# Altium PCB 底板-PCB.PcbDoc
Units mm, origin at the board's own origin, x right, y up, seen from the top; angles counter-clockwise.
Board outline 100 x 60 mm, 2 copper layers (Top Layer, Bottom Layer); 20 components, 38 nets, 84 pads, 0 vias.
Unrouted connection lines stored in the file: 33.
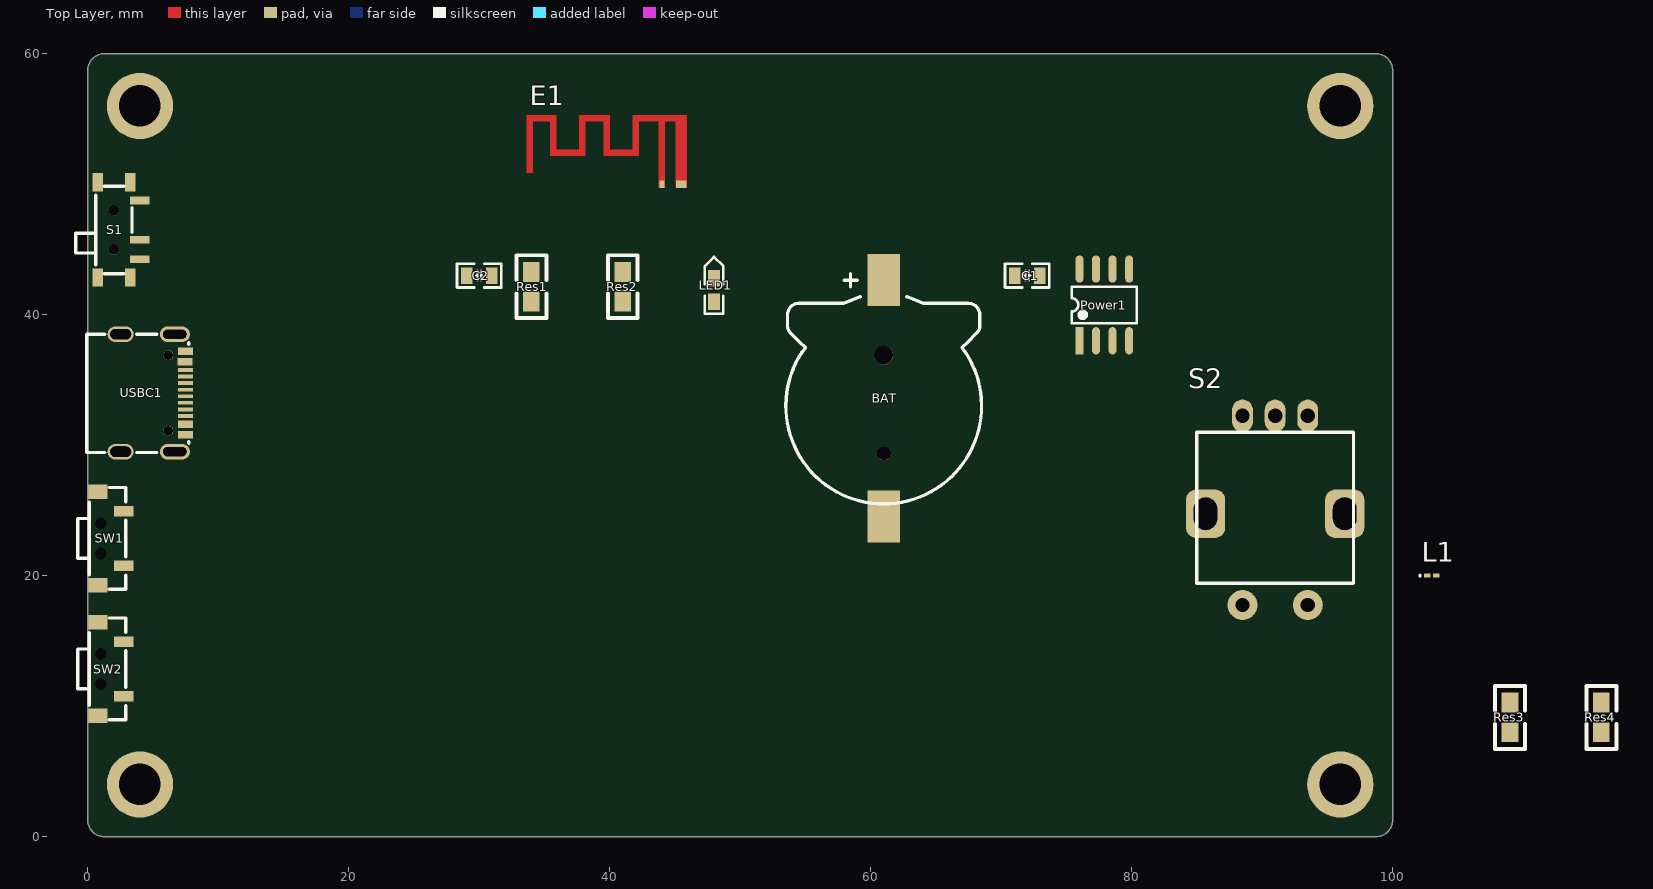
[diagram p0: Top Layer view]
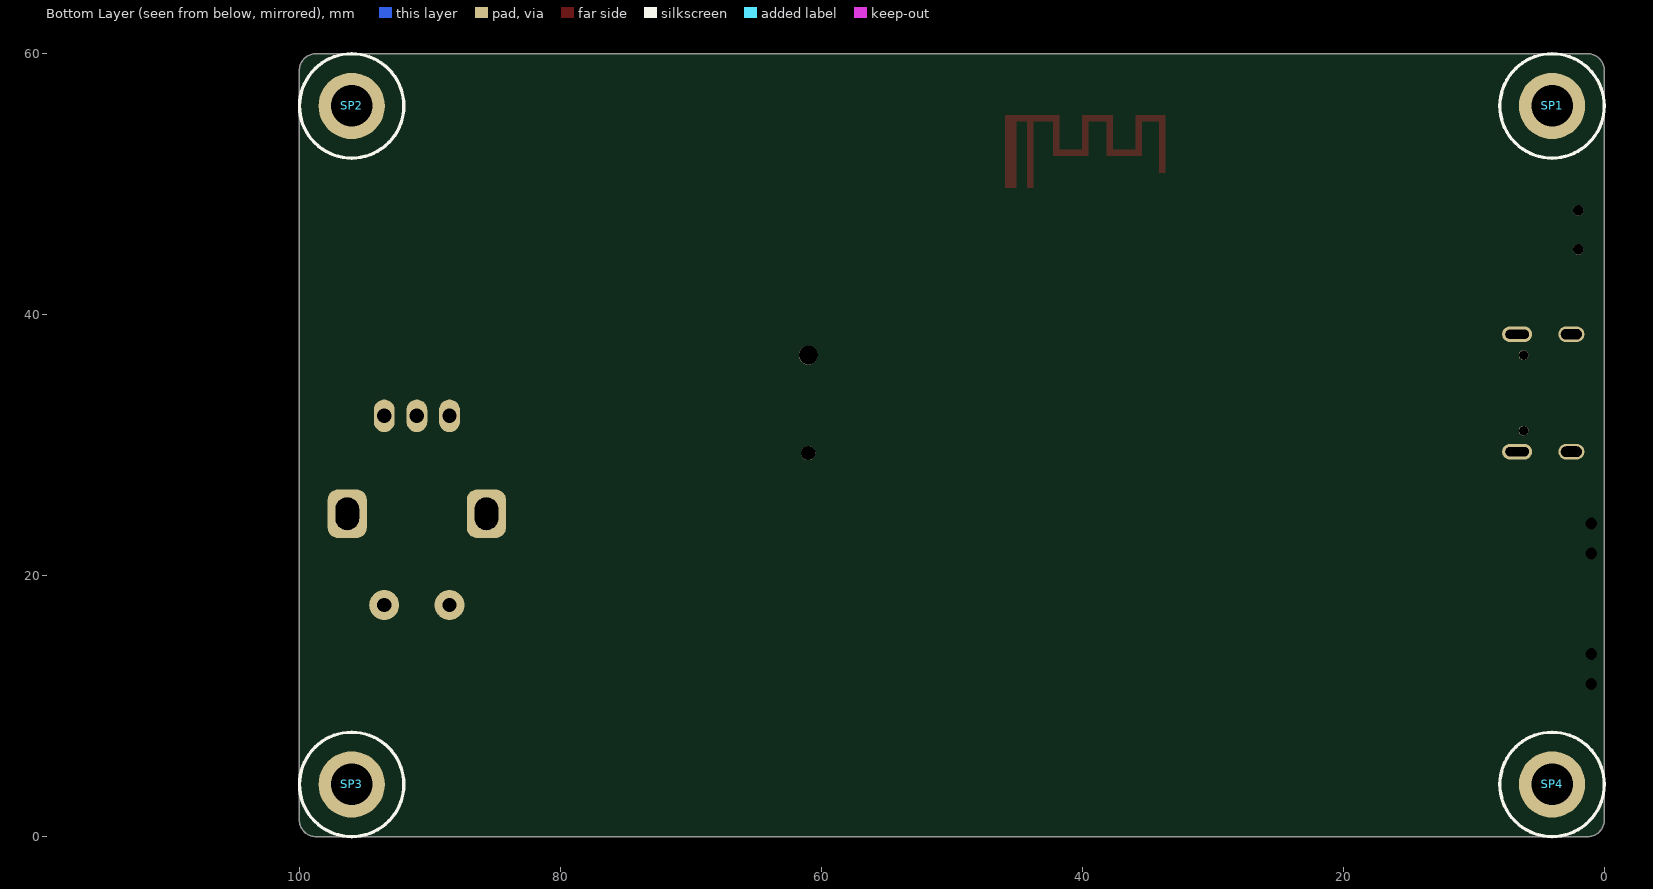
[diagram p1: Bottom Layer view, seen from below]

## Layer stack, top to bottom
Top Solder: solder mask 0.0102, Solder Resist, Dk 3.5
Top Layer: signal copper 0.0356
Dielectric 1: dielectric 0.32, FR-4, Dk 4.8
Bottom Layer: signal copper 0.0356
Bottom Solder: solder mask 0.0102, Solder Resist, Dk 3.5

## Board outline
0,1.27 0,58.73 cw(c1.27,58.73) 1.27,60 98.73,60 cw(c98.73,58.73) 100,58.73 100,1.27 cw(c98.73,1.27) 98.73,0 1.27,0 cw(c1.27,1.27)

## Design rules (kind name [scope] priority, off if disabled: settings)
Clearance [All] p1: gap=0.254 ignorepadtopadclearanceinfootprint=TRUE except(0: Arc-Hole Track-Hole SMDPad-Hole THPad-Hole Via-Hole Fill-Hole Poly-Hole Region-Hole Text-Hole)
PlaneConnect [All] p1: planeconnectstyle=Direct reliefexpansion=0.508 reliefentries=4 reliefconductorwidth=0.254 reliefairgap=0.254
PolygonConnect [All] p1: connectstyle=Direct reliefconductorwidth=0.254 reliefentries=4 polygonreliefangle="90 Angle" airgapwidth=0.254
RoutingVias [All] p1: holewidth=10 width=10 viastyle="Through Hole" minholewidth=0 minwidth=0 maxholewidth=0.711 maxwidth=1.27
SolderMaskExpansion [All] p1: expansion=0.102 istentingtop=FALSE
UnRoutedNet [All] p1: checkbadconnections=TRUE
Width [All] p1: maxlimit=100 minlimit=0.01 preferedwidth=0.254
28 further rules are at their usual default settings.

## Classes and differential pairs
component class 底板-供电: BAT C1 C2 LED1 Power1 Res1 Res2 S1 SP1 SP2 SP3 SP4 USBC1
component class 底板-交互: C3 C4 C5 C6 E1 L1 L2 Res3 Res4 S2 SW1 SW2 U1 Y1 Y2

## Components (designator, comment, footprint, x,y, rotation, side; value= is the part's Value field where it differs from the comment)
BAT "电池" CR1220_A 61,33 r90 top
C1 "10uF" C0805_L 72,43 r0 top
C2 "10uF" C0805_L 30,43 r0 top
E1 "ANTENNA" ANT-F-1-2.4G-1.6 44,50 r0 top
L1 "0Ω" 0603 103,20 r0 top
LED1 "LED" LED-0603B 48,41 r90 top
Power1 "TP4056" SOP8 76,38 r90 top
Res1 "1k" 0805R 34,41 r90 top
Res2 "1.2k" 0805R 41,41 r90 top
Res3 "1k" 0805R 109,8 r90 top
Res4 "1k" 0805R 116,8 r90 top
S1 "MSK-12C01-07" MSK-12C01-07 2,46.5 r270 top
S2 "SW-EC11" EC11 91,25 r90 top
SP1 "M3铜柱" M3x4_L 4,56 r180 bottom
SP2 "M3铜柱" M3x4_L 96,56 r180 bottom
SP3 "M3铜柱" M3x4_L 96,4 r180 bottom
SP4 "M3铜柱" M3x4_L 4,4 r180 bottom
SW1 "3x6x5" "SW 3*6*4.3-S-W" 1,22.85 r270 top
SW2 "3x6x5" "SW 3*6*4.3-S-W" 1,12.85 r270 top
USBC1 "TYPE-C 2.0 -16P" USB-C-SMD_16P 5,34 r90 top

## Footprints (in the part's own frame and the unit in brackets; to place one, negate y for a bottom-side part, rotate by r counter-clockwise, add the part's x,y. Pads: shape width x height; smd on the part's side, far side on the other; paste and mask are expansions set on the pad)
0603 [mm] "Chip Inductor, Body 0.6x0.3mm, IPC High Density"
  rect 0.5x0.3 smd: 1(-0.35,0) 2(0.35,0)
  silkscreen extent -0.9,-0.05 -0.9,0.05, body extent -0.33,-0.18 0.33,0.18, height 0.55
0805R [mil]
  rect 60x50 smd: 1(0,0) 2(90,0)
  silkscreen extent -50,-45 140,45, body extent 1,-25 80,25, height 15
ANT-F-1-2.4G-1.6 [mm]
  rect 0.8x0.6 smd mask+0: 0(1.483,0)
  rect 0.4x0.6 smd mask+0: 1(0,0)
  Top Layer region: 0.241,5.028 -0.259,5.028 -0.259,-0.304 0.241,-0.304
  Top Layer region: 1.939,5.002 1.039,5.002 1.039,-0.304 1.939,-0.304
  Top Layer region: 1.94,5.297 -2.26,5.297 -2.26,4.797 1.94,4.797
  Top Layer region: -1.759,4.977 -2.259,4.977 -2.259,2.157 -1.759,2.157
  Top Layer region: -1.85,2.651 -4.39,2.651 -4.39,2.157 -1.85,2.157
  Top Layer region: -3.96,4.976 -4.46,4.976 -4.46,2.156 -3.96,2.156
  Top Layer region: -3.965,5.296 -6.365,5.296 -6.365,4.796 -3.965,4.796
  Top Layer region: -5.86,4.977 -6.36,4.977 -6.36,2.157 -5.86,2.157
  Top Layer region: -5.875,2.656 -8.364,2.656 -8.364,2.156 -5.875,2.156
  Top Layer region: -8.061,4.977 -8.561,4.977 -8.561,2.157 -8.061,2.157
  Top Layer region: -8.059,5.296 -10.359,5.296 -10.359,4.796 -8.059,4.796
  Top Layer region: -9.86,4.976 -10.36,4.976 -10.36,0.856 -9.86,0.856
C0805_L [mil] "无极性贴片电容"
  rect 35x50 smd: 1(-37.4,0) 2(37.4,0)
  silkscreen extent -67,-36 67,36, body extent -39,-24 39,24, height 22
CR1220_A [mm] "纽扣电池座"
  round 1.1 hole 1.1: 0(-3.6,0)
  round 1.45 hole 1.45: 0(3.9,0)
  rect 4x2.5 smd: 1(9.652,0) 2(-8.458,0)
  silkscreen extent -7.5,-7.5 10.16,7.5, body extent -9.42,-7.45 10.34,7.45, height 4.05
EC11 [mm] "数字开关编码器"
  rrect50% 3.7x3 hole 1.8 slot 2.5 at 0 deg: 0(-0.254,5.334) 0(-0.254,-5.334)
  round 2.3 hole 1.1: 1(-7.25,2.5) 2(-7.25,-2.5)
  oval 2.5x1.6 hole 1.1: A(7.25,-2.5) B(7.25,2.5) C(7.25,0)
  silkscreen extent -5.59,-6 6,6, body extent -7.35,-6.24 7.45,6.24, height 22
LED-0603B [mil]
  rect 50x35 smd: A(0,0.26) K(70,0.26)
  silkscreen extent -36,-28 135,28, body extent 4,-15 66,17, height 24
M3x4_L [mm] "M3铜柱，长：4mm"
  round 5.08 hole 3.175: 1(0,0)
  silkscreen extent -4,-4 4,4, body extent -2.7,-2.35 2.7,2.35, height 4.05
MSK-12C01-07 [mm]
  rect 1.4x0.8 smd: 0(-3.65,-1.25) 0(-3.65,1.25) 0(3.65,-1.25) 0(3.65,1.25)
  rect 0.6x1.5 smd: 1(2.25,1.996) 2(0.75,1.996) 3(-2.25,1.996)
  round 0.8 hole 0.8: " "(-1.5,0) " "(1.5,0)
  silkscreen extent -3.35,-2.92 3.35,1.4, body extent -3.92,-2.89 3.92,2.41, height 1.5
SOP8 [mm]
  rect 2.1x0.6 smd: 1(0,0)
  oval 2.1x0.6 smd: 2(0,-1.27) 3(0,-2.54) 4(0,-3.81) 5(5.5,-3.81) 6(5.5,-2.54) 7(5.5,-1.27) 8(5.5,0)
  silkscreen extent 1.35,-4.41 4.15,0.6, body extent -0.21,-4.44 5.8,0.56, height 1.9
"SW 3*6*4.3-S-W" [mm] "侧立贴片3*6*4.3"
  rect 1.1x1.5 smd: 0(-3.575,-0.25) 0(3.575,-0.25)
  round 0 hole 0.9: 0(-1.15,0) 0(1.15,0)
  rect 0.8x1.5 smd: 1(2.1,1.75) 2(-2.1,1.75)
  silkscreen extent -3.9,-1.78 3.9,1.91, body extent -3.9,-1.79 3.9,1.91, height 3.51
USB-C-SMD_16P [mm] "封装库来自淘宝ID:黄晶宝石"
  oval 1.2x2 hole 0.8 slot 1.6 at 90 deg: 0(-4.5,2.475) 0(4.5,2.475)
  oval 1.2x2.3 hole 0.7 slot 1.8 at 90 deg: 0(-4.5,-1.675) 0(4.5,-1.675)
  rect 0.3x1.15 smd: A1(3.35,-2.473) A4(2.55,-2.471) A5(1.25,-2.475) A6(0.25,-2.475) A7(-0.25,-2.473) A9(-2.55,-2.475) A12(-3.35,-2.475) B1(-3.05,-2.475) B4(-2.25,-2.475) B5(-1.75,-2.475) B6(-0.75,-2.475) B7(0.75,-2.473) B9(2.25,-2.471) B12(3.05,-2.473)
  rect 0.3x1.148 smd: A8(1.75,-2.475) B8(-1.25,-2.475)
  round 0.75 hole 0.75 unplated: ""(-2.89,-1.175) ""(2.89,-1.175)
  silkscreen extent -4.56,-2.75 4.5,5.08, body extent -4.44,-2.87 4.5,5.03, height 3.25

## Part data
BAT: library part CR-3V, "微型电池", BOM名称=微型电池, 联系卖家，免费查找封装=唯一出售店铺网址https://shop463601444.taobao.com
C1 C2: library part Cap, "Capacitor", LatestRevisionDate=17-Jul-2002, LatestRevisionNote="Re-released for DXP Platform.", PackageDescription="Radial Cap, Thru-Hole; 2 Leads; 0.3 in Pin Spacing", PackageReference=RAD-0.3, Published=8-Jun-2000, Publisher="Altium Limited"
E1: "Generic Antenna"
L1: library part INDUCTOR
Res1 Res2 Res3 Res4: library part RES
S2: "旋转编码开关", 联系卖家，免费查找封装=唯一出售店铺网址https://shop463601444.taobao.com
SP1 SP2 SP3 SP4: library part 铜柱小焊盘, "铜柱", BOM名称=铜柱, 联系卖家，免费查找封装=唯一出售店铺网址https://shop463601444.taobao.com
SW1 SW2: library part "TSW 3x6", "3x6轻触开关", BOM名称=3x6轻触开关, 联系卖家，免费查找封装=唯一出售店铺网址https://shop463601444.taobao.com
USBC1: library part USB2.0_Type-C_16Pin, "USB2.0 Type-C 16Pin  母座", System=Connector, 联系卖家，免费技术支持=唯一出售店铺网址https://shop463601444.taobao.com

## Nets (pads, with @x,y where several pads share a name; then routed paths per layer and width w, separated by ;. In a path a pad name is that pad's centre, name@x,y a point inside that pad or via, vN(x,y) a via of type N, cw(c..) or ccw(c..) an arc to the next point about the centre after c; other vN are vias at no path point)
ANT: E1.1
GND: BAT.2 C1.1 C2.1 Power1.1 Power1.3 Power1.6 Res2.1 SW1.2 SW2.2 USBC1.0 USBC1.A1 USBC1.A12 USBC1.B1 USBC1.B12
key: Res4.2 SW2.1
key1: Res3.2 SW1.1
NetLED1_K: LED1.K Res1.2
NetPower1_2: Power1.2 Res2.2
NetPower1_7: Power1.7 Res1.1
PA4: 
PA5: 
PA8: 
PA9: 
PA10: 
PA11: 
PA12: 
PA13: 
PA14: 
PA15: 
PB4: 
PB7: 
PB10: 
PB11: 
PB12: 
PB13: 
PB14: 
PB15: 
PB22: 
PB23: 
RX: USBC1.A6 USBC1.B6
TX: USBC1.A7 USBC1.B7
VBAT: BAT.1 C1.2 Power1.5 S1.3
VBUS: C2.2 LED1.A Power1.4 Power1.8 S1.1 USBC1.A4 USBC1.A9 USBC1.B4 USBC1.B9
VCC: Res3.1 Res4.1 S1.2
VDCIA: L1.2
VDCID: L1.1
VINTA: 
VSW: 
X32MI: 
X32MO: 
pads on no net: "S1. " BAT.0 E1.0 S1.0 S2.0 S2.1 S2.2 S2.A S2.B S2.C SP1.1 SP2.1 SP3.1 SP4.1 SW1.0 SW2.0 USBC1. USBC1.A5 USBC1.A8 USBC1.B5 USBC1.B8

## Silkscreen, mask and mechanical layers (free items; w line width, h text height)
Mechanical 1:
  lines w0.1: 0,1.27 ccw(c1.27,1.27) 1.27,0 98.73,0 ccw(c98.73,1.27) 100,1.27 100,58.73 ccw(c98.73,58.73) 98.73,60 1.27,60 ccw(c1.27,58.73) 0,58.73 0,15 0,1.27